# Altium PCB trigger_box_v1.PcbDoc
Units mil, origin at the board's own origin, x right, y up, seen from the top; angles counter-clockwise.
Board outline 2165.74 x 2165.73 mil, 2 copper layers (Top Layer, Bottom Layer); 62 components, 62 nets, 324 pads, 114 vias.
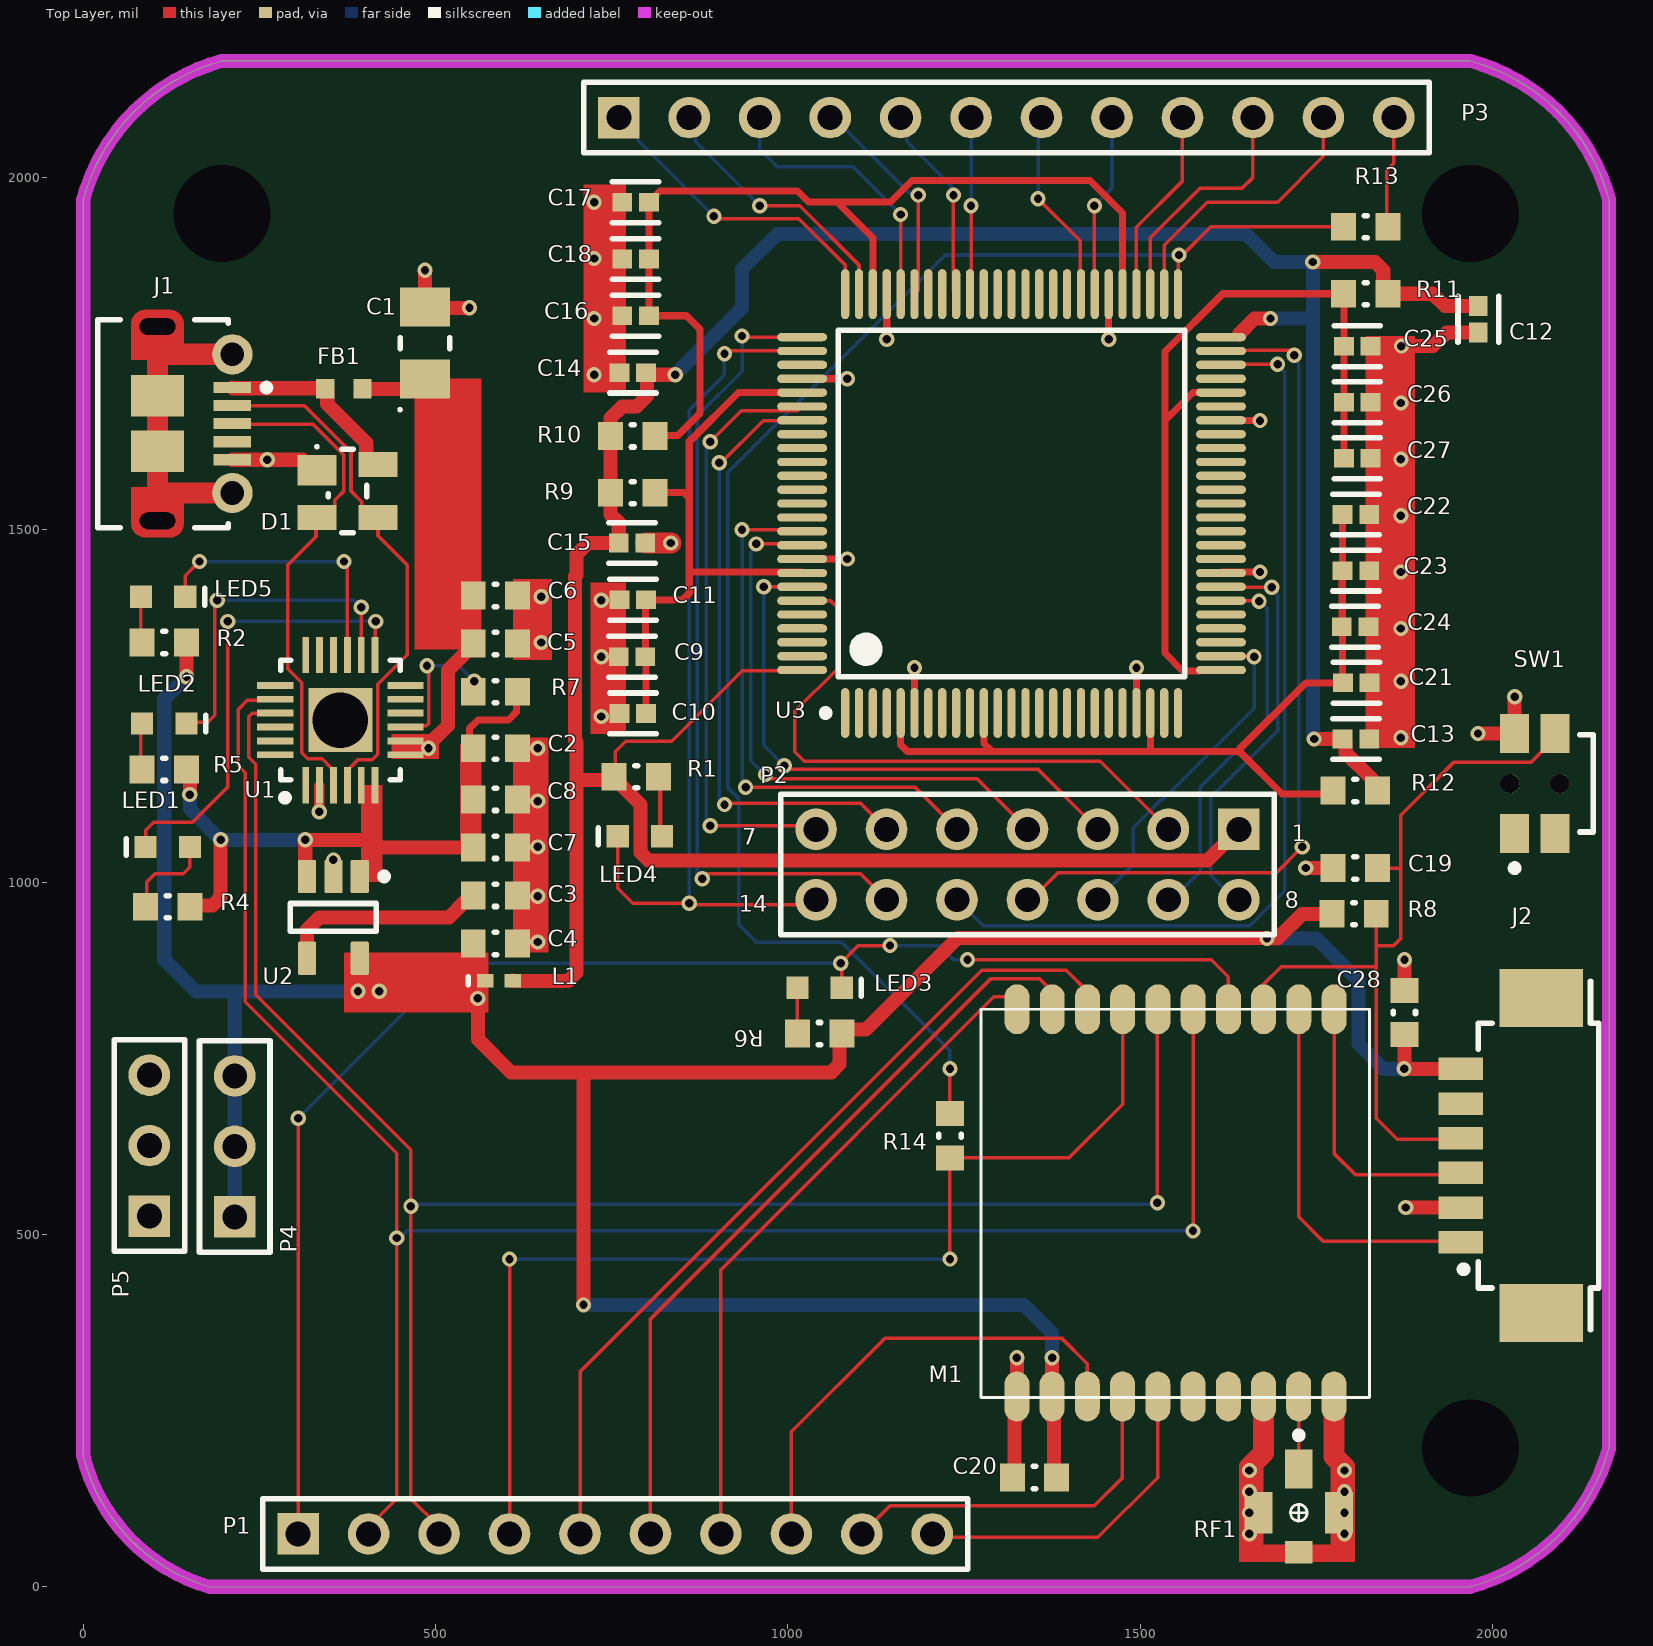
[diagram p0: Top Layer view]
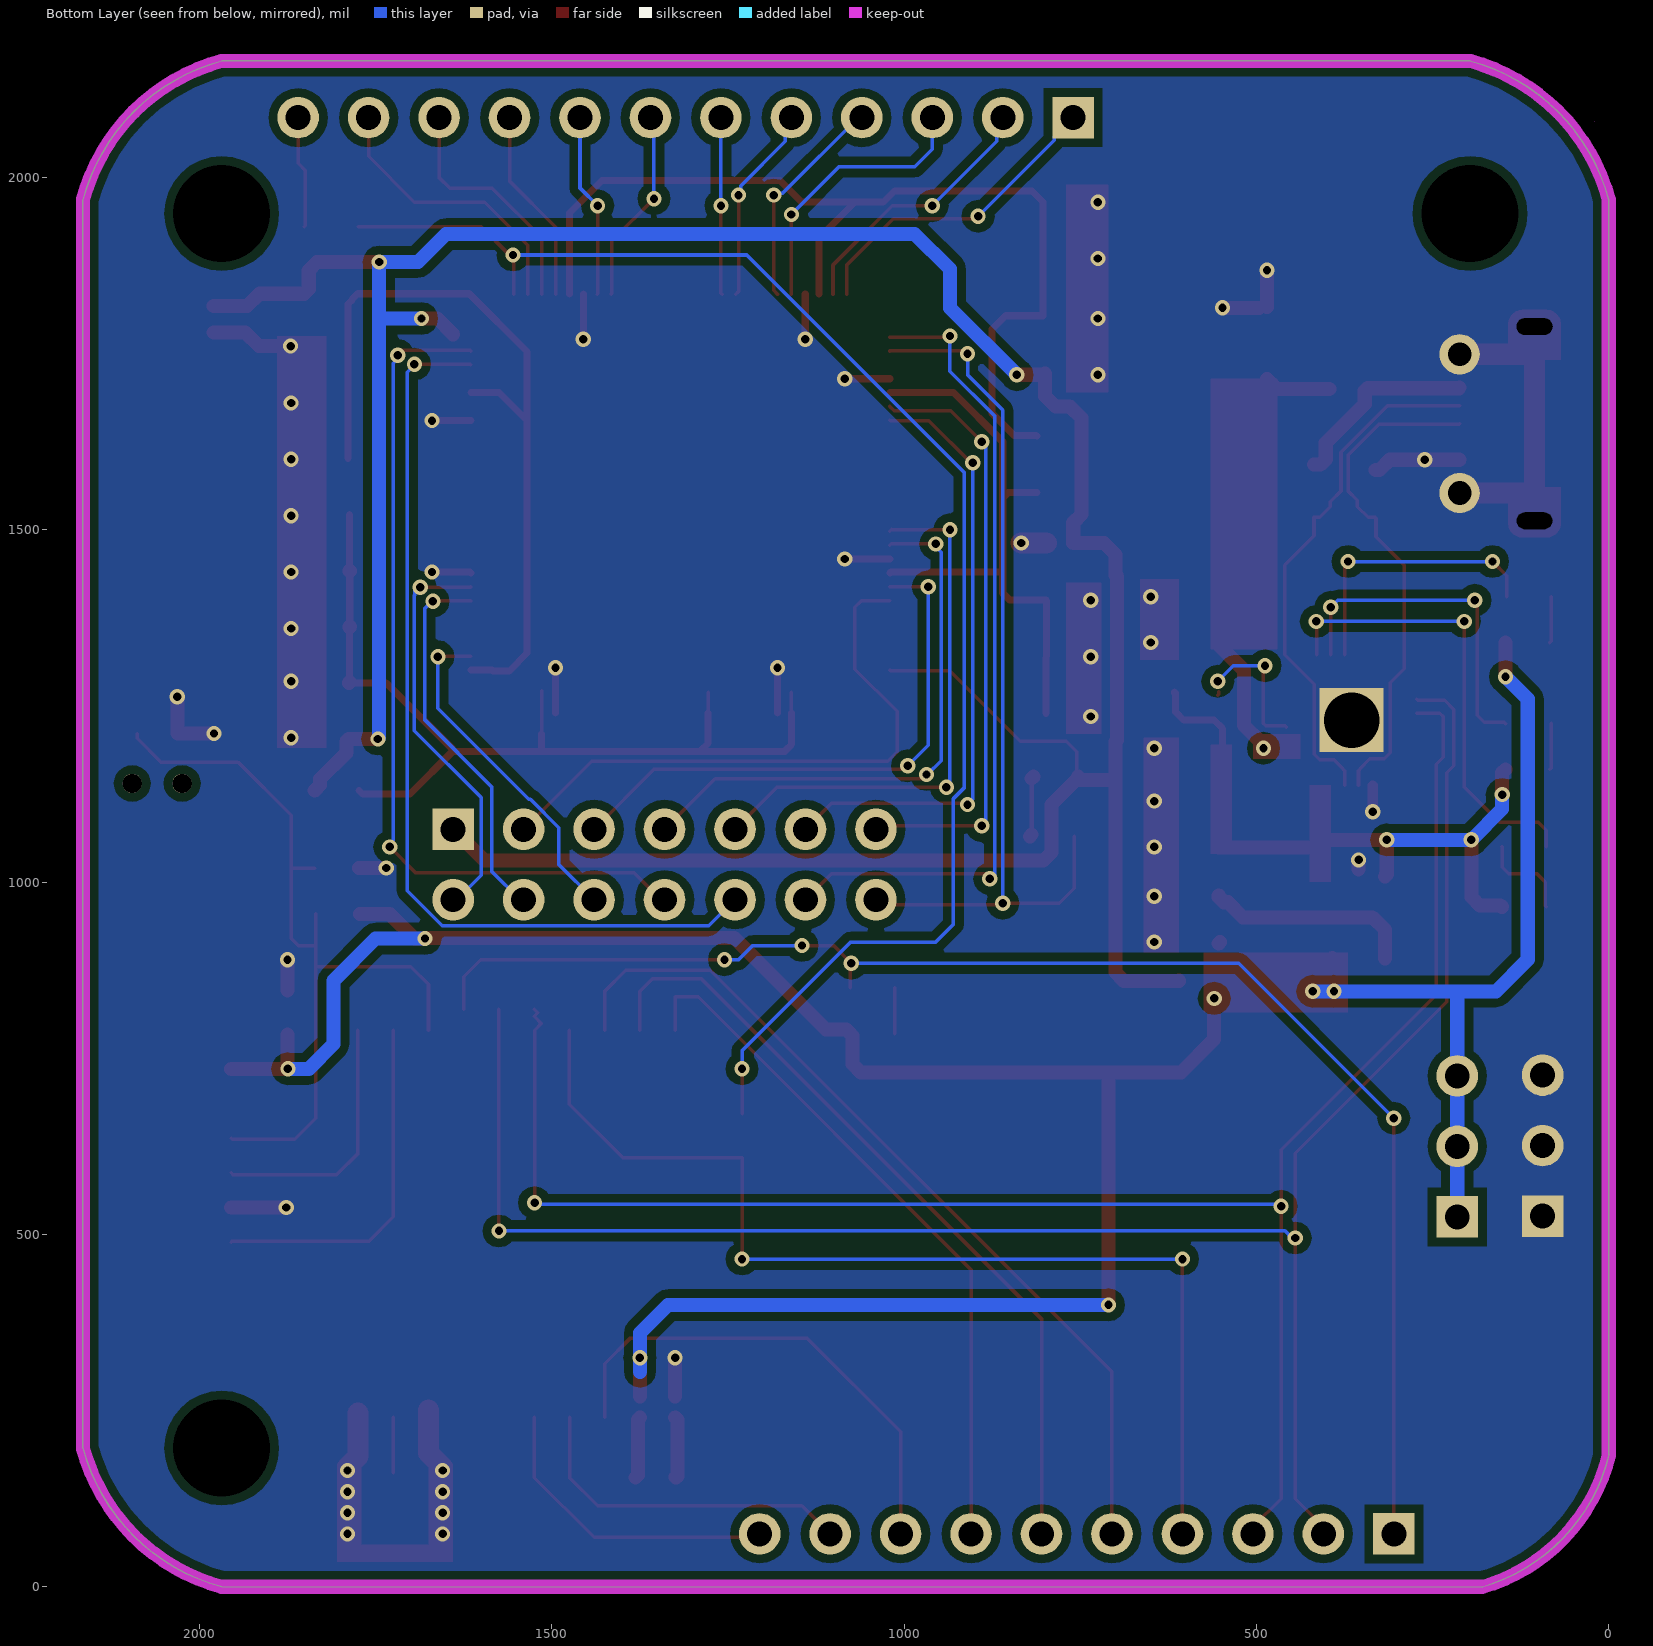
[diagram p1: Bottom Layer view, seen from below]

## Layer stack, top to bottom
Top Solder: solder mask 0.4, Solder Resist, Dk 3.5
Top Layer: signal copper 1.4
Dielectric 1: dielectric 12.6, FR-4, Dk 4.8
Bottom Layer: signal copper 1.4
Bottom Solder: solder mask 0.4, Solder Resist, Dk 3.5

## Board outline
179.49,-0.38 cw(c251.82,249.08) -0.38,186.99 0,187.08 0,1968.5 cw(c268.9,1896.45) 196.85,2165.35 1968.5,2165.35 cw(c1896.45,1896.45) 2165.35,1968.5 2165.35,196.85 cw(c1896.45,268.9) 1968.5,0

## Design rules (kind name [scope] priority, off if disabled: settings)
Clearance Clearance_POW [InPoly] p1: gap=12 ignorepadtopadclearanceinfootprint=FALSE
Clearance [InNetClass('All Nets')] p2: gap=5 ignorepadtopadclearanceinfootprint=FALSE
HoleSize [All] p1: absolutevalues=TRUE maxlimit=200 minlimit=1 maxpercent=80.000 minpercent=20.000
HoleToHoleClearance [All] p1: gap=0 allowstackedmicrovias=TRUE
MinimumSolderMaskSliver [All] p1: minsoldermaskwidth=0
PlaneConnect [All] p1: planeconnectstyle=Direct reliefexpansion=20 reliefentries=4 reliefconductorwidth=10 reliefairgap=10
PolygonConnect [All] p1: connectstyle=Direct reliefconductorwidth=10 reliefentries=4 polygonreliefangle="90 Angle" airgapwidth=10
RoutingVias [All] p1: holewidth=11.81 width=19.68 viastyle="Through Hole" minholewidth=11.81 minwidth=19.68 maxholewidth=200 maxwidth=200
SilkToSilkClearance [All] p1: silktosilkclearance=0
SilkToSolderMaskClearance [IsPad] p1: minsilkscreentomaskgap=0 clearancetoexposedcopper=TRUE
SolderMaskExpansion [All] p1: expansion=4 istentingtop=FALSE
Width [InNetClass('VCC')] p1: maxlimit=1000 minlimit=5 preferedwidth=5 minimp=50.000000 maximp=50.000000 favimp=50.000000
24 further rules are at their usual default settings.

## Classes and differential pairs
net class POW: 3.3V 3.3VD CP2102_3.3VDD VBUS VBUS_IN VCCIO0 VCCIO1 VCCIO2 VCCIO3

## Components (designator, comment, footprint, x,y, rotation, side; value= is the part's Value field where it differs from the comment)
C1 "TAJA106K016RNJ" CAPMP3217X18-T_V 485,1765 r90 top
C2 "1uF" CAPC0603(1608)55_N 585,1190 r180 top value=4.7uF
C3 "10nF" CAPC0603(1608)55_N 585,981.13 r180 top value=4.7uF
C4 "2.2uF" CAPC0603(1608)55_N 585,912.99 r180 top value=4.7uF
C5 "CAP 100nF 6.3V" CAPC0603(1608)100_N 585,1338.71 r180 top value=100nF
C6 "CAP 4.7uF 6.3V" CAPC0603(1608)100_N 585,1406.85 r180 top value=4.7uF
C7 "CAP 100nF 6.3V" CAPC0603(1608)100_N 585,1049.28 r180 top value=100nF
C8 "CAP 4.7uF 6.3V" CAPC0603(1608)100_N 585,1117.42 r180 top value=4.7uF
C9 "0.1uF" FP-GRM155-0_05-IPC_A 778.84,1320.04 r180 top
C10 "0.1uF" FP-GRM155-0_05-IPC_A 780,1239.42 r180 top
C11 "0.01uF" FP-GRM155-0_05-IPC_A 780,1400.66 r180 top
C12 "10uF" FP-GRM155-0_05-IPC_A 1980,1798.84 r270 top
C13 "1uF" FP-GRM155-0_05-IPC_A 1806.16,1203.18 r0 top
C14 "0.1uF" FP-GRM155-0_05-IPC_A 780,1723.14 r180 top
C15 "0.01uF" FP-GRM155-0_05-IPC_A 778.84,1481.28 r0 top
C16 "0.1uF" FP-GRM155-0_05-IPC_A 783.84,1803.76 r180 top
C17 "0.1uF" FP-GRM155-0_05-IPC_A 783.84,1965 r180 top
C18 "0.01uF" FP-GRM155-0_05-IPC_A 783.84,1884.38 r180 top
C19 "CAP 1uF 25V" CAPC0603(1608)100_N 1805,1020 r180 top value=1uF
C20 "CAP 100nF 6.3V" CAPC0603(1608)100_N 1350,155 r0 top value=100nF
C21 "0.1uF" FP-GRM155-0_05-IPC_A 1806.69,1282.82 r0 top
C22 "0.1uF" FP-GRM155-0_05-IPC_A 1806.16,1521.77 r0 top
C23 "0.1uF" FP-GRM155-0_05-IPC_A 1806.16,1442.12 r0 top
C24 "0.01uF" FP-GRM155-0_05-IPC_A 1805,1362.47 r0 top
C25 "0.1uF" FP-GRM155-0_05-IPC_A 1808.01,1760.71 r0 top
C26 "0.1uF" FP-GRM155-0_05-IPC_A 1808.01,1681.06 r0 top
C27 "0.01uF" FP-GRM155-0_05-IPC_A 1808.01,1601.41 r0 top
C28 "CAP 100nF 6.3V" CAPC0603(1608)100_N 1875,815 r270 top value=100nF
D1 "SP0503BAHTG" LFUS-SOT143-4_V 375,1555 r0 top
FB1 "BLM18PG600SN1J" MURA-BLM18PG_KG-CHIP-2_V2 370,1700 r180 top
J1 "105017-0001" USB-MICRO-B_V 158.46,1650.63 r270 top
J2 "Header 6" GH-1.25-WS-6P 2065.24,611.97 r90 top
L1 "500mA" 0402-A 590,860 r0 top value=600ohm
LED1 "150060BS75000" 0603_A 120,1050 r0 top
LED2 "150060BS75000" 0603_A 115,1225 r180 top
LED3 "150060BS75000" 0603_A 1045,850 r180 top
LED4 "150060BS75000" 0603_A 790,1065 r0 top
LED5 "150060BS75000" 0603_A 113.25,1405 r180 top
M1 "CC1310-Module (Silicontrac)" CC1310ZTR4-GC 1825.32,270.61 r180 top
P1 "Header 10" HDR1X10 305,75 r0 top
P2 "Header 7X2A" HDR2X7_CEN 1640,1075 r180 top
P3 "Header 12" HDR1X12 760,2085 r0 top
P4 "Header 3" HDR1X3 215,525 r90 top
P5 "Header 3" HDR1X3 93.79,526.06 r90 top
R1 "1K 1%" RESC0603(1608)_N 785,1149.56 r180 top value="1000.00 Ohm"
R2 "1K 1%" RESC0603(1608)_N 115,1340 r0 top value="1000.00 Ohm"
R4 "1K 1%" RESC0603(1608)_N 120,965 r0 top value="1000.00 Ohm"
R5 "1K 1%" RESC0603(1608)_N 115,1160 r0 top value="1000.00 Ohm"
R6 "1K 1%" RESC0603(1608)_N 1045,785 r0 top value="1000.00 Ohm"
R7 "1K 1%" RESC0603(1608)_N 585,1270 r180 top value="1000.00 Ohm"
R8 "10K 1% 0603(1608)" RESC0603(1608)_N 1803.5,955 r0 top value="10000.00 Ohm"
R9 "1" RESC0603(1608)_N 780,1552.66 r180 top value="1000.00 Ohm"
R10 "1" RESC0603(1608)_N 780,1633.28 r180 top value="1000.00 Ohm"
R11 "1" RESC0603(1608)_N 1820,1835 r0 top value="1000.00 Ohm"
R12 "1" RESC0603(1608)_N 1805,1130 r0 top value="1000.00 Ohm"
R13 "0" RESC0603(1608)_N 1820,1930 r0 top value="10000.00 Ohm"
R14 "1K 5%" RESC0603(1608)_N 1230,640 r270 top value="10000.00 Ohm"
RF1 "RECE-20369-001E-01" IPEX_MHF_I 1725,105 r180 top
SW1 "EVQ-P7D01K" FP-EVQ-P7D01K-MFG 2060,1140 r90 top
U1 "CP2102N-A01-GQFN24" SLAB-QFN-24-2550x2550TP_A_V 365,1230 r90 top
U2 "LP2985-33DBVR" DBV0005A_M 355,950 r270 top
U3 "LCMXO2-256HC-4TG100I" TQFP100_N 1317.48,1537.24 r90 top

## Footprints (in the part's own frame and the unit in brackets; to place one, negate y for a bottom-side part, rotate by r counter-clockwise, add the part's x,y. Pads: shape width x height; smd on the part's side, far side on the other; paste and mask are expansions set on the pad)
0402-A [mm] "Chip Inductor, Body 1.0x0.5mm, IPC High Density"
  rect 0.6x0.5 smd: 1(-0.5,0) 2(0.5,0)
  silkscreen extent -1.1,-0.15 -1.1,0.15, body extent -0.55,-0.3 0.55,0.3, height 0.55
0603_A [mm] "Chip LED, 2-Leads, Body 1.6x0.8mm, IPC Medium Density"
  rect 0.8x0.8 smd: 1(-0.8,0) 2(0.8,0)
  silkscreen extent -1.5,-0.3 -1.5,0.3, body extent -0.8,-0.4 0.8,0.4, height 0.7
CAPC0603(1608)55_N [mm] "Chip Capacitor, Body 1.6x0.8mm, Height 0.55mm, IPC Medium Density"
  rect 0.9x1 smd: 1(-0.8,0) 2(0.8,0)
  silkscreen extent -0.05,-0.4 0.05,0.4, body extent -0.87,-0.48 0.88,0.47, height 0.55
CAPC0603(1608)100_N [mm] "Chip Capacitor, Body 1.6x0.8mm, Height 1.0mm, IPC Medium Density"
  rect 0.9x1 smd: 1(-0.8,0) 2(0.8,0)
  silkscreen extent -0.05,-0.4 0.05,0.4, body extent -0.87,-0.48 0.88,0.47, height 1
CAPMP3217X18-T_V [mm] "Molded Capacitor, 2-Leads, Body 3.40x1.8mm"
  rect 1.4x1.8 smd: 1(-1.3,0) 2(1.3,0)
  silkscreen extent -2.45,-0.9 0.2,0.95, body extent -1.92,-0.9 1.92,0.9, height 1.8
CC1310ZTR4-GC [mm]
  oval 0.9x1.8 smd: 1(1.27,-13.945) 2(2.544,-13.945) 3(3.814,-13.945) 4(5.084,-13.945) 5(6.354,-13.945) 6(7.624,-13.945) 7(8.894,-13.945) 8(10.164,-13.945) 9(11.434,-13.945) 10(12.704,-13.945) 11(12.708,0.015) 12(11.438,0.015) 13(10.168,0.015) 14(8.898,0.015) 15(7.628,0.015) 16(6.358,0.015) 17(5.088,0.015) 18(3.818,0.015) 19(2.548,0.015) 20(1.28,0.015)
  silkscreen extent 0,-13.94 14,0.06
DBV0005A_M [mm] "SOT23, 5-Leads, Body 3.05x1.75mm, Pitch 0.95mm, IPC Low Density"
  rrect15% 1.2x0.65 smd: 1(-1.475,0.95) 2(-1.475,0) 3(-1.475,-0.95) 4(1.475,-0.95) 5(1.475,0.95)
  silkscreen extent -1.6,-1.55 0.5,1.95, body extent -1.42,-1.46 1.42,1.46, height 1.08
FP-EVQ-P7D01K-MFG [mm]
  rect 1.4x1.05 smd paste+0 mask+0: 1(-1.8,0.725) 1'(1.8,0.725) 2(-1.8,-0.725) 2'(1.8,-0.725)
  round 0.7 hole 0.7 unplated paste-1000 mask+0: ""(0,0.9) ""(0,-0.9)
  silkscreen extent -3.17,-2.1 1.75,0.85, body extent -2.6,-2.2 2.6,1.55, height 0.25
FP-GRM155-0_05-IPC_A [mil]
  rect 28.16x26.48 smd paste+0 mask+0: 1(-18.84,0) 2(18.84,0)
  silkscreen extent -33,-29 33,29, body extent -41,-21 41,21, height 10
GH-1.25-WS-6P [mm]
  rect 0.81x1.6 smd: 1(-3.125,2.8) 2(-1.875,2.8) 3(-0.625,2.8) 4(0.625,2.8) 5(1.875,2.8) 6(3.125,2.8)
  rect 2.1x3 smd: MP1(-5.675,-0.1) MP2(5.675,-0.1)
  silkscreen extent -6.27,-2.17 6.27,2.82, body extent -6.13,-2.1 6.13,3.3, height 3.4
HDR1X3 [mm] "Connector; Header; 3 Position"
  rect 1.5x1.5 hole 0.9: 1(0,0)
  round 1.5 hole 0.9: 2(2.54,0) 3(5.08,0)
  silkscreen extent -1.27,-1.27 6.35,1.27
HDR1X10 [mm] "Connector; Header; 10 Position"
  rect 1.5x1.5 hole 0.9: 1(0,0)
  round 1.5 hole 0.9: 2(2.54,0) 3(5.08,0) 4(7.62,0) 5(10.16,0) 6(12.7,0) 7(15.24,0) 8(17.78,0) 9(20.32,0) 10(22.86,0)
  silkscreen extent -1.27,-1.27 24.13,1.27
HDR1X12 [mm] "Connector; Header; 12 Position"
  rect 1.5x1.5 hole 0.9: 1(0,0)
  round 1.5 hole 0.9: 2(2.54,0) 3(5.08,0) 4(7.62,0) 5(10.16,0) 6(12.7,0) 7(15.24,0) 8(17.78,0) 9(20.32,0) 10(22.86,0) 11(25.4,0) 12(27.94,0)
  silkscreen extent -1.27,-1.27 29.21,1.27
HDR2X7_CEN [mm] "Connector; Header; 7x2 Position"
  rect 1.5x1.5 hole 0.9: 1(0,0)
  round 1.5 hole 0.9: 2(2.54,0) 3(5.08,0) 4(7.62,0) 5(10.16,0) 6(12.7,0) 7(15.24,0) 8(0,2.54) 9(2.54,2.54) 10(5.08,2.54) 11(7.62,2.54) 12(10.16,2.54) 13(12.7,2.54) 14(15.24,2.54)
  silkscreen extent -1.27,-1.27 16.51,3.81
IPEX_MHF_I [mm]
  rect 1x1.4 smd: 1(0,-1.575)
  rect 1x1.5 smd: 2(1.448,0) 3(-1.448,0)
  rect 1x0.8 smd: 4(0,1.422)
  silkscreen extent -0.3,-2.92 0.3,0.3, body extent -0.85,-0.85 0.85,0.85, height 0.85
LFUS-SOT143-4_V [mm] "SOT143, 4-Leads, Body 3.04x1.4mm, Pitch 1.90mm"
  rect 1.4x1.1 smd: 1(-1.1,0.75)
  rect 1.4x0.9 smd: 2(-1.1,-0.95) 3(1.1,-0.95) 4(1.1,0.95)
  silkscreen extent -1.15,-1.5 0.7,1.65, body extent -0.7,-1.52 0.7,1.52, height 1.22
MURA-BLM18PG_KG-CHIP-2_V2 [mm] "Chip Ferrite Bead, 2-Leads, Body 1.6x0.8mm, Height 0.95mm, Reflow, 0.5 to 1.5A Rated Current"
  rect 0.65x0.7 smd: 1(-0.675,0) 2(0.675,0)
  body extent -0.8,-0.4 0.8,0.4, height 0.95
RESC0603(1608)_N [mm] "Chip Resistor, Body 1.6x0.8mm, IPC Medium Density"
  rect 0.9x1 smd: 1(-0.8,0) 2(0.8,0)
  silkscreen extent -0.05,-0.4 0.05,0.4, body extent -0.85,-0.47 0.85,0.47, height 0.6
SLAB-QFN-24-2550x2550TP_A_V [mm]
  rect 1.3x0.25 smd: 1(-2.35,1.25) 2(-2.35,0.75) 3(-2.35,0.25) 4(-2.35,-0.25) 5(-2.35,-0.75) 6(-2.35,-1.25) 13(2.35,-1.25) 14(2.35,-0.75) 15(2.35,-0.25) 16(2.35,0.25) 17(2.35,0.75) 18(2.35,1.25)
  rect 0.25x1.3 smd: 7(-1.25,-2.35) 8(-0.75,-2.35) 9(-0.25,-2.35) 10(0.25,-2.35) 11(0.75,-2.35) 12(1.25,-2.35) 19(1.25,2.35) 20(0.75,2.35) 21(0.25,2.35) 22(-0.25,2.35) 23(-0.75,2.35) 24(-1.25,2.35)
  rect 2.3x2.3 hole 2: 25(0,0)
  silkscreen extent -2.92,-2.15 2.15,2.15, body extent -2,-2 2,2, height 0.8
TQFP100_N [mm] "Thin QFP, 100-Leads, Body 14x14mm, Pitch 0.5mm, IPC Medium Density"
  oval 1.8x0.3 smd: 1(-7.55,6) 2(-7.55,5.5) 3(-7.55,5) 4(-7.55,4.5) 5(-7.55,4) 6(-7.55,3.5) 7(-7.55,3) 8(-7.55,2.5) 9(-7.55,2) 10(-7.55,1.5) 11(-7.55,1) 12(-7.55,0.5) 13(-7.55,0) 14(-7.55,-0.5) 15(-7.55,-1) 16(-7.55,-1.5) 17(-7.55,-2) 18(-7.55,-2.5) 19(-7.55,-3) 20(-7.55,-3.5) 21(-7.55,-4) 22(-7.55,-4.5) 23(-7.55,-5) 24(-7.55,-5.5) 25(-7.55,-6) 51(7.55,-6) 52(7.55,-5.5) 53(7.55,-5) 54(7.55,-4.5) 55(7.55,-4) 56(7.55,-3.5) 57(7.55,-3) 58(7.55,-2.5) 59(7.55,-2) 60(7.55,-1.5) 61(7.55,-1) 62(7.55,-0.5) 63(7.55,0) 64(7.55,0.5) 65(7.55,1) 66(7.55,1.5) 67(7.55,2) 68(7.55,2.5) 69(7.55,3) 70(7.55,3.5) 71(7.55,4) 72(7.55,4.5) 73(7.55,5) 74(7.55,5.5) 75(7.55,6)
  oval 0.3x1.8 smd: 26(-6,-7.55) 27(-5.5,-7.55) 28(-5,-7.55) 29(-4.5,-7.55) 30(-4,-7.55) 31(-3.5,-7.55) 32(-3,-7.55) 33(-2.5,-7.55) 34(-2,-7.55) 35(-1.5,-7.55) 36(-1,-7.55) 37(-0.5,-7.55) 38(0,-7.55) 39(0.5,-7.55) 40(1,-7.55) 41(1.5,-7.55) 42(2,-7.55) 43(2.5,-7.55) 44(3,-7.55) 45(3.5,-7.55) 46(4,-7.55) 47(4.5,-7.55) 48(5,-7.55) 49(5.5,-7.55) 50(6,-7.55) 76(6,7.55) 77(5.5,7.55) 78(5,7.55) 79(4.5,7.55) 80(4,7.55) 81(3.5,7.55) 82(3,7.55) 83(2.5,7.55) 84(2,7.55) 85(1.5,7.55) 86(1,7.55) 87(0.5,7.55) 88(0,7.55) 89(-0.5,7.55) 90(-1,7.55) 91(-1.5,7.55) 92(-2,7.55) 93(-2.5,7.55) 94(-3,7.55) 95(-3.5,7.55) 96(-4,7.55) 97(-4.5,7.55) 98(-5,7.55) 99(-5.5,7.55) 100(-6,7.55)
  silkscreen extent -7.67,-6.25 6.25,6.82, body extent -7,-7 7,7, height 1.6
USB-MICRO-B_V [mm] "USB, MICRO B, Body 7.491x4.695 mm, Pitch 0.65 mm"
  rect 0.4x1.35 smd: 1(-1.3,1.35) 2(-0.65,1.35) 3(0,1.35) 4(0.65,1.35) 5(1.3,1.35)
  round 1.45 hole 0.85: 6(-2.5,1.35) 7(2.5,1.35)
  rrect50% 0x0 hole 0.6 slot 1.3 at 90 deg: 8(-3.5,-1.35) 11(3.5,-1.35)
  rect 1.5x1.9 smd: 9(-1,-1.35) 10(1,-1.35)
  Top Layer circle w0.5: c-3.6,-1.8 r0.25
  Top Layer circle w0.5: c-3.6,-0.9 r0.25
  Top Layer circle w0.5: c3.6,-1.8 r0.25
  Top Layer circle w0.5: c3.6,-0.9 r0.25
  Top Layer region: -3.6,-1.8 -3.6,-0.9 -4.1,-0.9 -4.1,-1.8
  Top Layer region: 3.6,-0.9 3.6,-1.8 4.1,-1.8 4.1,-0.9
  Top Layer region: 2.3,-0.4 2.3,-2.3 3.6,-2.3 3.6,-0.4
  Top Layer region: -2.3,-2.3 -2.3,-0.4 -3.6,-0.4 -3.6,-2.3
  silkscreen extent -3.75,-3.5 3.75,2.7, body extent -4.1,-3.9 4.1,1.5, height 2.67

## Part data
C1: library part CMP-1661-00004-1, "Standard Tantalum, 10 uF, +/- 10%, 16 V, -55 to 125 degC, 2-Pin SMD (1206), RoHS, Tape and Reel", Case\Package=SOT-26, Frequency="300 MHz", Max Operating Temperature="150 degC", Max Power Dissipation="300 mW", Min Operating Temperature="-55 degC", Package Quantity=3000, ComponentLink1Description="Manufacturer URL", ComponentLink1URL=http://www.avx.com/, ComponentLink2Description=Datasheet, ComponentLink2URL=http://datasheets.avx.com/TAJ.pdf, ComponentLink3Description="Package Specification", ComponentLink3URL=http://www.avx.com/download/software/literature/AVX-Footprint-Library.pdf, DatasheetVersion=Feb-16, Elements=2, Height="1.3 mm", hFE Min=60, Length="3.1 mm", Mount="Surface Mount", PackageDescription="2-Pin Surface Mount Device, Body 3.2 x 1.65 mm", PackageReference=CAPMP3217X18-T, Packaging="Tape and Reel", Pins=6, Radiation Hardening=No, REACH SVHC="No SVHC", RoHSCompliant=true, Vce Max="500 mV", Width="1.7 mm"
C2 C3 C4: library part CMP-1035-02786-1, "CAP 4.7uF 10V ±20% 0603 (1608 Metric) Thickness 0.55mm SMD", Case-EIA=0603, Case-Metric=1608, Rated Voltage="10 V", Tolerance=Â±20%, Max Thickness="0.55 mm", Technology=SMT
C5 C7: library part CMP-1035-02575-1, "CAP 100nF 6.3V ±5% 0603 (1608 Metric) Thickness 1mm SMD", Case-EIA=0603, Case-Metric=1608, Rated Voltage="6.3 V", Tolerance=Â±5%, Max Thickness="1 mm", Technology=SMT
C6 C8: library part CMP-1035-02782-1, "CAP 4.7uF 6.3V ±20% 0603 (1608 Metric) Thickness 1mm SMD", Case-EIA=0603, Case-Metric=1608, Rated Voltage="6.3 V", Tolerance=Â±20%, Max Thickness="1 mm", Technology=SMT
C9 C10 C12 C13 C14 C15 C16 C17 C21 C22 C23 C25 C26: library part CMP-2008-04561-5, "CAP CER 0.1UF 10V X5R 0402", Capacitance=220nF, Case Code (Imperial)=0402, Case Code (Metric)=1005, Dielectric=X5R, Dielectric Material=Ceramic, Insulation Resistance=10GR, Max Operating Temperature=85°C, Min Operating Temperature=-55°C, Package Quantity=1, Tolerance=10%, Voltage=10V, Case/Package=0402, Depth=0.5mm, Height=0.5mm, Lead Free="Lead Free", Length=1mm, Material=Ceramic, Mount="Surface Mount", Number of Pins=2, Packaging="Tape and Reel", Radiation Hardening=No, REACH SVHC="No SVHC", RoHS Compliant=Yes, Series=GRM, Termination=SMD/SMT, Thickness=0.022inch, Voltage Rating=10V, Voltage Rating (DC)=10V, Width=0.5mm
C11 C18 C24 C27: library part CMP-2008-04561-5, "CAP CER 0.01UF 10V X5R 0402", Capacitance=220nF, Case Code (Imperial)=0402, Case Code (Metric)=1005, Dielectric=X5R, Dielectric Material=Ceramic, Insulation Resistance=10GR, Max Operating Temperature=85°C, Min Operating Temperature=-55°C, Package Quantity=1, Tolerance=10%, Voltage=10V, Case/Package=0402, Depth=0.5mm, Height=0.5mm, Lead Free="Lead Free", Length=1mm, Material=Ceramic, Mount="Surface Mount", Number of Pins=2, Packaging="Tape and Reel", Radiation Hardening=No, REACH SVHC="No SVHC", RoHS Compliant=Yes, Series=GRM, Termination=SMD/SMT, Thickness=0.022inch, Voltage Rating=10V, Voltage Rating (DC)=10V, Width=0.5mm
C19: library part CMP-1035-02741-1, "CAP 1uF 25V ±20% 0603 (1608 Metric) Thickness 1mm SMD", Case-EIA=0603, Case-Metric=1608, Rated Voltage="25 V", Tolerance=Â±20%, Max Thickness="1 mm", Technology=SMT
C20 C28: library part CMP-1035-02576-1, "CAP 100nF 6.3V ±10% 0603 (1608 Metric) Thickness 1mm SMD", Case-EIA=0603, Case-Metric=1608, Rated Voltage="6.3 V", Tolerance=Â±10%, Max Thickness="1 mm", Technology=SMT
D1: library part CMP-2000-05191-1, "TVS Diode Array, 30 pF, 30 KV, -40 to 85 degC, 4-Pin SOT143, RoHS, Tape and Reel", Capacitance Value=30pF, Clamping Voltage=8V, Leakage Current=0.1uA, Manufacturer=Littelfuse, Operating Temp Range=-40Cto85C, Operating Temperature Classification=Industrial, Operating Temperature Max Deg. C=85C, Operating Temperature Min Deg. C=-40C, Package / Case=SOT-143, Reverse Stand-off Voltage=5.5(Min)V, Working Voltage=5.5V, Working Voltage (Max)=5.5V(Min), Clamping Voltage (Max)=8V, Configuration=Triple, Datasheet URL=https://datasheet.ciiva.com/15143/getdatasheetpartid-116020-15143550.pdf, Datasheet Version=Dec-13, Direction Type=Uni-Directional, Leakage Current (Max)=0.1uA, Manufacturer URL=http://www.littelfuse.com/, Mounting=SurfaceMount, Mounting Style=SurfaceMount, Number of Elements=3, Package Type=SOT-143, Packaging=TapeandReel, Pin Count=3+Tab, Polarity=Uni-Directional, Product Depth (mm)=1.4mm, Product Height (mm)=1.05mm, Product Length (mm)=3.04mm, Rad Hardened=No, Suppressor Type=TVS
FB1: library part CMP-0686-00574-2, "Chip Ferrite Bead for Power Lines, 60 Ohm, 500 mA, -55 to 125 degC, 1.6 x 0.8 x 0.95 mm SMD, Tape and Reel", DC Resistance="0.10 Ohm Max.", Manufacturer=Murata, Operating Temperature Range="-55 to 125 degC", Rated Current="500 mA", ComponentLink1Description="Manufacturer URL", ComponentLink1URL=http://www.murata.com/, ComponentLink2Description=Datasheet, ComponentLink2URL=http://www.murata.com/products/catalog/pdf/c31e.pdf, ComponentLink3Description="Package Specification", ComponentLink3URL=http://www.murata.com/products/catalog/pdf/c31e.pdf, DatasheetVersion=08/2013, Impedance (at 100 MHz)="60 Ohm Typ.", Mounting Technology="Surface Mount", PackageDescription="2-Pin Chip, Body 1.6 x 0.8 mm", PackageReference=BLM18_H950-2, Packing="Tape and Reel", PartNumber=BLM18PG600SN1J
J1: library part CMP-2000-05827-1, "Micro-USB B Receptacle, Right Angle, Bottom Mount, Surface Mount, with Solder Tabs, -30 to 85 degC, 5-Pin USB, RoHS, Tape and Reel", Manufacturer=Molex, Package Description="5-Leads USB, Micro B, Body 7.5 x 5 mm, Pitch 0.65 mm", Package Reference=MICRO-B, Package Version="Rev. F, 12/2012", Standard Package=1, Voltage - Max=30V, 3D Model=105017-0001.stp, Catalog Drawings=1050170001, Category=Connectors,Interconnects, Circuits=5, Connector Type=USB-microB, Datasheet URL=http://www.molex.com/elqNow/elqRedir.htm?ref=http://www.molex.com/webdocs/datasheets/pdf/en-us/1050170001_IO_CONNECTORS.pdf, Datasheet Version=03/2016, Family=USB,DVI,HDMIConnectors, Featured Product=Micro-USBConnectorsUSBConnectors, Features=Shielded,SolderRetention, Gender=Receptacle, Ingress Protection=-, Manufacturer URL=http://www.molex.com/, Mating Products=WM17145-ND-CABLEMICROUSBBTOSTDA1.0MWM17147-ND-CABLEMICROUSBBTOSTDA2.0MWM17146-ND-CABLEMICROUSBBTOSTDA1.5M, Mounting Technology=SurfaceMount, Mounting Type=BoardCutout,SurfaceMount,RightAngle, Number Of Contacts=5, Online Catalog=Molex-MicroUSB, Other Names=WM1399DKR, Package URL=http://www.molex.com/pdm_docs/sd/1050170001_sd.pdf, Packaging=Digi-Reel®, PCN Assembly/Origin=ResinSupplier21/Oct/2015, RoHS Information=1050170001CertofCompliance, Series=-, Specifications=-
J2: "Header, 6-Pin", LatestRevisionDate=17-Jul-2002, LatestRevisionNote="Re-released for DXP Platform.", Publisher="Altium Limited"
L1: library part Inductor, "Inductor", Code_IEC=1005, Code_JEITA=0402, LatestRevisionDate=29-May-2009, LatestRevisionNote="IPC-7351 Footprint Added.", PackageDescription="Chip Inductor", PackageReference=0402-A, Published=8-Jun-2000, Publisher="Altium Limited"
LED1 LED2 LED3 LED4 LED5: library part CMP-1426-00003-1, "SMD mono-color Chip LED, WL-SMCW, Blue", Color=Blue, Manufacturer="Wuerth Elektronik", ComponentLink1Description="Manufacturer URL", ComponentLink1URL=http://www.we-online.com, ComponentLink2Description=Datasheet, ComponentLink2URL=http://katalog.we-online.com/led/datasheet/150060BS75000.pdf, PackageReference=0603_A, PartNumber=150060BS75000
M1: library part CC1310-MOD
P1: "Header, 10-Pin", LatestRevisionDate=17-Jul-2002, LatestRevisionNote="Re-released for DXP Platform.", Publisher="Altium Limited"
P2: "Header, 7-Pin, Dual row", LatestRevisionDate=17-Jul-2002, LatestRevisionNote="Re-released for DXP Platform.", Publisher="Altium Limited"
P3: "Header, 12-Pin", LatestRevisionDate=17-Jul-2002, LatestRevisionNote="Re-released for DXP Platform.", Publisher="Altium Limited"
P4 P5: "Header, 3-Pin", LatestRevisionDate=17-Jul-2002, LatestRevisionNote="Re-released for DXP Platform.", Publisher="Altium Limited"
R1 R2 R4 R5 R6 R9 R10 R11 R12: library part CMP-1012-00510-1, "1K 0.1W 1% 0603 (1608 Metric)  SMD", Case-EIA=0603, Case-Metric=1608, Power="0.1 W", Tolerance="1 %", Technology=SMT
R7: library part CMP-1012-00510-1, "1K 0.1W 1% 0603 (1608 Metric)  SMD", Case-EIA=0603, Case-Metric=1608, Manufacturer="Vishay Dale", Manufacturer Part Number=CRCW06031K00FKEB, Power="0.1 W", Tolerance="1 %", Technology=SMT
R8 R13 R14: library part CMP-1012-00623-1, "10K 0.1W 1% 0603 (1608 Metric)  SMD", Case-EIA=0603, Case-Metric=1608, Power="0.1 W", Tolerance="1 %", Technology=SMT
RF1: library part TG-RECE-20369-001E-01-4, "RF Connector, Onboard Receptacle, IPEX MHFIII", Housing Color=Gold, Manufacturer=Taoglas, ComponentLink1Description="Manufacturer URL", ComponentLink1URL=http://www.taoglas.com/, ComponentLink2Description=Datasheet, ComponentLink2URL=http://www.taoglas.com/images/product_images/original_images/RECE.20369.001E.01.pdf, ComponentLink3Description="Package Specification", ComponentLink3URL=http://www.taoglas.com/images/product_images/original_images/RECE.20369.001E.01.pdf, DatasheetVersion="Rev. C", Mounting Technology="Surface Mount", PackageDescription="4-Pin, Hand Drawn, Body 1.7x1.7mm", PackageReference=RECE-20369-001E-01-4, PackageVersion="Rev. C", Packing="Tape and Reel", PartNumber=RECE-20369-001E-01
SW1: library part CMP-05618-000102-1, "SWITCH TACTILE SPST-NO 0.05A 12V", Actuator Color=Black, Contact Current Rating=50mA, Contact Resistance=500mR, Max Operating Temperature=70°C, Max Voltage Rating (DC)=12V, Min Operating Temperature=-20°C, Operating Force=2.2N, Package Quantity=1, Actuator Length=0.65mm, Current Rating=50mA, Depth=3.55mm, Electrical Life=100000Cycles, Illumination Type=Non-Illuminated, Lead Free="Lead Free", Length=4.3mm, Max Current Rating=50mA, Mechanical Life=100000Cycles, Mount="Surface Mount", Orientation="Right Angle", Packaging="Tape and Reel", Radiation Hardening=No, REACH SVHC="No SVHC", Series=EVQP7, Size=2.9mm, Switch Function=Off-Mom, Switch Travel=0.2mm, Termination=J-Bend, Throw Configuration=SPST, Voltage Rating (DC)=12V
U1: library part SLAB-CP2102N-QFN-24, "USBXpress(TM) Family, 4 GPIOs, 2.2 to 3.6 V, -40 to 85 degC, 24-Pin QFN, RoHS", Case\/Package=QFN, Manufacturer="Silicon Labs", Max Operating Temperature=85degC, Max Supply Voltage=3.6V, Min Operating Temperature=-40degC, Min Supply Voltage=3V, Package Description="24-Pin Quad Flat No-lead Package, Body 4 x 4 mm, Pitch 0.5 mm", Package Reference=QFN-24-2550x2550TP_A, Datasheet URL=http://www.silabs.com/documents/public/data-sheets/cp2102n-datasheet.pdf, Datasheet Version="Rev. 1.1, 08/2016", Manufacturer URL=http://www.silabs.com/, Mounting Technology=SurfaceMount, Number of Pins=24, REACH SVHC=Unknown, RoHSCompliant=False
U2: library part CMP-0758-00080-2, "Single Output Low Noise LDO, 150 mA, Fixed 3.3 V Output, 1.5% Tolerance, 2.2 to 16 V Input, Low IQ, 5-Pin SOT-23 (DBV), -40 to 125 degC, Green (RoHS & no Sb/Br), Tape and Reel", Manufacturer="Texas Instruments", Operating Temperature Range (degC)="-40 to 125", Accuracy (%)=1.5, ComponentLink1Description="Manufacturer URL", ComponentLink1URL=http://www.ti.com/, ComponentLink2Description=Datasheet, ComponentLink2URL=http://www.ti.com/lit/ds/symlink/lp2985-50.pdf, ComponentLink3Description="Package Specification", ComponentLink3URL=http://www.ti.com/litv/pdf/mpds018j, DatasheetVersion=SLVS522N, Fixed Output Options (V)=3.3, Iout (Max) (A)=0.15, Iq (Typ) (mA)=0.85, Mounting Technology="Surface Mount", Output Options="Fixed Output", PackageDescription="5-Pin Plastic Small Outline, Body 2.9 x 1.6 mm, Pitch 0.95 mm", PackageReference=DBV0005A, PackageVersion=4073253-4/L, Packing="Tape and Reel", PartNumber=LP2985-33DBVR, RoHS=TRUE, Vdo (Typ) (mV)=280, Vin (V)="2.2 to 16"
U3: library part CMP-0111-00366-1, "MachXO2 High Performance CPLD with 256 LUTs, Voltage Regulator, 2.5V/3.3V, 100-pin TQFP, Speed Grade-4, Industrial Grade, Halogen Free (RoHS)", Code_JEDEC=MS-026-BED, DatasheetVersion="ver01.0, Nov-2010", PackageDescription="100-Pin Thin Quad Flat Pack (TQFP100)", PackageReference=TQFP100, PackageVersion="ver02.6, Nov-2010"

## Free pads (board coordinates)
  round 60 hole 137.8: 5(196.85,1948.82) 7(1968.5,1948.82) 8(1968.5,196.85)

## Via types
v1: diameter 21.65, hole 11.81, Top Layer to Bottom Layer, tented both sides, 114 vias

## Nets (pads, with @x,y where several pads share a name; then routed paths per layer and width w, separated by ;. In a path a pad name is that pad's centre, name@x,y a point inside that pad or via, vN(x,y) a via of type N, cw(c..) or ccw(c..) an arc to the next point about the centre after c; other vN are vias at no path point)
3.3V: C12.1 C13.1 C14.1 C15.1 L1.2 P2.1 R1.2 R9.2 R10.2 R11.2 R12.2 U3.50 U3.100 | length 4718
  Top Layer w5: R1.2 755,1151.05 755,1185 770,1200 835,1200 935,1300 1019.21,1300 U3.100
  Top Layer w20: L1.2 609.84,859.84 617.58,859.84 617.65,859.77 688.28,859.77 700,871.49 700,1140 ; v1(840,1720) 801.98,1720 800,1721.98 800,1690 785,1675 765,1675 748.5,1658.5 R10.2 R9.2 748.5,1521.5 760,1510 C15.1 716.28,1481.28 700,1465 700,1436.11 698,1434.11 698,1200.89 700,1198.89 700,1140 ; P2.1 1595.47,1030.47 802.46,1030.47 790.75,1042.19 790.75,1110.34 753.5,1147.59 R1.2 748.95,1145 705,1145 700,1140 ; U3.50@1640.16,1777.56 1662.28,1799.68 1684.68,1799.68 v1(1685,1800) ; v1(1745,1880) 1833.24,1880 1844.95,1868.28 1844.95,1841.54 R11.2 1915,1835 1932.32,1817.68 C12.1 ; v1(1746.82,1203.18) 1788.16,1203.18 1791.4,1199.94 1791.4,1183.6 1828.78,1146.22 1828.78,1137.72 R12.2
  Bottom Layer w20: v1(840,1720) 935,1815 935,1870 985,1920 1650,1920 1690,1880 v1(1745,1880) 1745,1800 ; v1(1685,1800) 1745,1800 ; v1(1746.82,1203.18) 1745,1205 1745,1800
3.3VD: C4.2 C20.2 C28.2 J2.6 L1.1 M1.12 P4.1 P4.2 P4.3 R2.2 R6.2 R8.1 U2.5 | length 4185.4
  Top Layer w5: v1@145,1290 v1(146.5,1291.5)
  Top Layer w20: v1(146.5,1291.5) R2.2 ; v1(390,845) v1@390,845.45 ; U2.5 U2.5@395,889.33 ; C4.2@551.49,915 C4.2 ; v1(560,835) 560,777.03 607.03,730 710,730 ; 560,850 560.16,849.84 ; v1(710,400) 710,730 ; M1.12@1374.83,240.39 1377.78,237.44 1377.78,158.72 C20.2 ; M1.12 v1(1375,325) ; R8.1 1730,955 1695,920 v1(1680,920) 1679.17,920.83 1240.83,920.83 1110.66,790.66 1082.16,790.66 R6.2 1073.33,781.84 1073.33,741.72 1061.62,730 710,730 ; C28.2 1875,735.45 v1(1874.55,735) J2.6
  Bottom Layer w20: v1(146.5,1291.5) 115,1260 115,890 160,845 215,845 ; P4.1 P4.2 P4.3 215,845 ; v1(420,845) v1(390,845) 215,845 ; v1(710,400) 1335,400 1374.83,360.17 1374.83,305.17 ; v1(1680,920) 1750,920 1810,860 1810,770 1845,735 v1(1874.55,735)
CC1310_nRESET: C19.1 J2.4 M1.3 R8.2 SW1.2' | length 1176.7
  Top Layer w5: M1.3@1675,790 1675,855 1700,880 1835,880 ; R8.2 1835,910 ; C19.1 1870,1020 ; J2.4 1953.43,635 1865,635 1835,665 1835,880 ; SW1.2' 2088.54,1203.98 2054.97,1170.4 1945.4,1170.4 1870,1095 1870,1020 ; 1835,880 1835,910 ; 1835,910 1860,910 1870,920 1870,1020
CC1310_TCKC: J2.1 M1.2 | length 509.9
  Top Layer w5: M1.2@1725,790 1725,525 1760,490 1953.94,490 J2.1
CC1310_TMSC: J2.3 M1.1 | length 368.3
  Top Layer w5: M1.1@1775.15,790 1775.15,614.85 1805,585 1952.64,585 J2.3
CC1310_UART_RX: M1.5 P1.2 U1.20 | length 2787.1
  Top Layer w5: U1.20 270.9,1257.94 232.94,1257.94 220,1245 220,1165 230,1155 230,830 445,615 v1(445,495) 445,125 405,85 P1.2 ; v1(1575,505) 1575.17,505.17 M1.5
  Bottom Layer w5: v1(445,495) 449.51,495 459.51,505 v1(1575,505)
CC1310_UART_TX: M1.6 P1.3 U1.21 | length 2660.3
  Top Layer w5: U1.21 239.84,1239.84 235,1235 235,1177.15 245,1167.15 245,840 465,620 v1(465,540) 465,125 505,85 P1.3 ; v1(1524.43,545) 1524.43,790 1515,799.43 1525,809.43 1520,814.43 M1.6
  Bottom Layer w5: v1(465,540) 467.5,542.5 1522.5,542.5 v1@1525,545
CoP_LED1: LED3.1 M1.4 P1.1 | length 2111.8
  Top Layer w5: P1.1 v1(305,665) ; LED3.1 1076.5,883.5 v1(1075,885) 1100,910 v1(1145,910) ; v1(1255,890) 1601.09,890 1625.17,865.91 M1.4
  Bottom Layer w5: v1(305,665) 525,885 v1(1075,885) ; v1(1145,910) 1215,910 1235,890 v1(1255,890)
CP2102_3.3VDD: C2.2 C7.2 C8.2 R4.2 R5.2 R7.1 U1.5 U1.6 U2.1 U2.3 | length 796.7
  Top Layer w10: C2.2@548.28,1195 548.28,1218.28 560,1230 603.28,1230 615,1241.72 615,1268.5 R7.1 R7.1@616.5,1268.03
  Top Layer w20: R5.2 151.25,1155.25 v1(151.25,1124.2) ; R4.2 153.58,967.08 183.28,967.08 195,978.8 v1(195,1060) ; U2.3 315,1010.67 315.83,1011.5 315,1012.32 v1(315,1060) 399.53,1060 408.27,1068.74 409.53,1068.74 ; 410,1050 410.72,1049.28 C7.2
  Bottom Layer w20: v1(151.25,1124.2) 151.25,1103.75 v1(195,1060) v1(315,1060)
CP2102_RXT: LED1.1 U1.13 | length 658.3
  Top Layer w5: LED1.1 88.5,1073.5 100,1085 155,1085 205,1135 v1(205,1370) ; U1.13 414.61,1322.91 414.61,1369.61 v1(415,1370)
  Bottom Layer w5: v1(205,1370) v1(415,1370)
CP2102_SUSPEND: LED5.1 U1.15 | length 397.9
  Top Layer w5: LED5.1 145,1405.25 145,1435 v1(165,1455) ; v1(370,1455) 374.84,1450.16 U1.15
  Bottom Layer w5: v1(165,1455) v1(370,1455)
CP2102_TXT: LED2.1 U1.14 | length 485.8
  Top Layer w5: LED2.1 148.31,1226.82 176.82,1226.82 186.67,1236.67 186.67,1396.67 v1(190,1400) ; U1.14 v1(394.48,1390)
  Bottom Layer w5: v1(190,1400) 384.48,1400 v1(394.48,1390)
D+: D1.2 J1.3 U1.3 | length 723.2
  Top Layer w5: J1.3 212.24,1650 326.04,1650 370,1606.04 370,1555 356.75,1541.75 356.75,1532.82 341.54,1517.6 D1.2 330.31,1516.22 330.31,1490.31 290,1450 290,1302.81 309.99,1282.82 309.99,1183.85 318.83,1175.01 339.06,1175.01 352.74,1161.34 352.74,1160.57 355.16,1158.15 U1.3
D-: D1.3 J1.2 U1.4 | length 753.4
  Top Layer w5: J1.2 313.96,1676.22 380,1610.18 380,1555 395.11,1539.89 395.11,1532.82 410.33,1517.6 D1.3 418.31,1491.69 460,1450 460,1322.81 417.78,1280.59 417.78,1181.62 410.06,1173.9 389.83,1173.9 377.26,1161.34 377.26,1160.57 374.84,1158.15 U1.4
DIO_4: M1.8 P1.5 | length 1270.3
  Top Layer w5: P1.5 705,305 1275,875 1395,875 1425.17,844.83 1425.17,836.31 M1.8 ; M1.8@1425,790 1425,819.61 M1.8@1425,836.31
DIO_5: M1.9 P1.6 | length 1150.5
  Top Layer w5: P1.6 805,380 1287.54,862.54 1357.46,862.54 1375.17,844.83 1375.17,832.93 M1.9 ; M1.9@1375,790 1375,819.61 M1.9@1375,832.93
DIO_6: M1.10 P1.7 | length 1002.4
  Top Layer w5: P1.7 905,450 1292.07,837.07 1325,837.07 M1.10@1325,790
DIO_7: M1.13 P1.8 | length 711.1
  Top Layer w5: P1.8 1005,220 1137.93,352.93 1388.37,352.93 1424.83,316.48 M1.13@1424.83,240.39
DIO_8: M1.14 P1.9 | length 488.5
  Top Layer w5: P1.9 1145,115 1435,115 1474.83,154.83 M1.14@1474.83,240.39
DIO_9: M1.15 P1.10 | length 442.6
  Top Layer w5: P1.10 1210,70 1440,70 1524.83,154.83 M1.15@1524.83,240.39
FPGA_INITn: LED4.1 P2.14 U3.77 | length 1280.5
  Top Layer w5: LED4.1 758.5,991.5 780,970 v1(860,970) 861.81,968.19 1033.19,968.19 P2.14 ; v1(910,1750) 914.39,1754.39 1019.63,1754.39 U3.77
  Bottom Layer w5: v1(860,970) 860,1670 910,1720 v1(910,1750)
GND: C1.2 C2.1 C3.1 C4.1 C5.1 C6.1 C7.1 C8.1 C9.2 C10.2 C11.2 C12.2 C13.2 C14.2 C15.2 C16.2 C17.2 C18.2 C19.2 C20.1 C21.2 C22.2 C23.2 C24.2 C25.2 C26.2 C27.2 C28.1 D1.1 J1.5 J1.6 J1.7 J1.8 J1.9 J1.10 J1.11 J2.2 M1.11 M1.18 M1.20 P5.1 P5.2 P5.3 RF1.2 RF1.3 RF1.4 SW1.1' U1.2 U1.25 U2.2 U3.6 U3.22 U3.33 U3.44 U3.56 U3.72 U3.79 U3.92 | length 1942.1
  Top Layer w10: U3.92 v1(1084.41,1458.5) ; U3.79 v1(1084.41,1714.41) ; v1(1140.31,1770.31) U3.72 ; U3.6 v1(1179.68,1304.17) ; v1(1455.28,1770.31) U3.56 ; U3.22 v1(1494.65,1304.17) ; U3.33 1615.91,1440 v1(1670,1440) ; U3.44 1615.08,1655 v1(1670,1655)
  Top Layer w15: v1(335,1100) U1.2@335,1137.01
  Top Layer w20: J1.5 v1(261.24,1599.45) 310.87,1599.45 325.31,1585 D1.1@331.22,1585 ; U2.2@355,1018.07 v1(355,1031.54) ; C1.2 v1(485,1868.27) ; C1.2@496.18,1815 v1(548.27,1815) ; C20.1@1324.17,155.66 1323.5,155 1321.87,156.63 1321.87,237.44 M1.11@1324.83,240.39 ; M1.11 v1(1325,325) ; v1(1735,1020) C19.2 ; v1@1865,1755 v1(1870.71,1760.71) 1915.71,1760.71 1935,1780 C12.2 ; C28.1 v1(1875,890) ; v1(1876.85,538.15) J2.2 ; v1(1979.37,1210.87) SW1.1' v1(2031.46,1262.96)
  Top Layer w30: 105,1765 105,1755 105.31,1754.69 105.31,1741.18 ; J1.7 113.19,1552.2 105.31,1560.08 J1.10 J1.9 105.31,1741.18 ; J1.6 113.19,1749.06 105.31,1741.18 ; C15.2 v1(833.72,1481.28) ; v1@1655,168.75 1655,170 1675,190 M1.18@1675,250.57 ; M1.20@1775,246.19 1775,185 v1@1790,170
  other v1: 1655,75 1790,75 1655,105 1790,105 1655,135 1790,135 1655,165 1790,165 645,915 645,980 645,1050 645,1115 645,1190 1870,1205 735,1235 1870,1285 735,1320 650,1340 1870,1360 735,1400 650,1405 1870,1440 1870,1520 1870,1600 1870,1680 725,1720 725,1800 725,1885 725,1965
NetC3_2: C3.2 U2.4 | length 297.8
  Top Layer w20: U2.4 317.6,932.6 335,950 519.07,950 540.52,971.45 545.79,971.45 553.5,979.16 C3.2
NetLED1_2: LED1.2 R4.1 | length 134.5
  Top Layer w5: R4.1 90.12,966.61 90.12,1000.12 101.73,1011.73 141.73,1011.73 151.22,1021.22 151.22,1049.72 LED1.2
NetLED2_2: LED2.2 R5.1 | length 66.1
  Top Layer w5: LED2.2@81.76,1225.43 81.76,1161.75 R5.1
NetLED3_2: LED3.2 R6.1 | length 65
  Top Layer w5: R6.1 LED3.2
NetLED4_2: LED4.2 R1.1 | length 86.6
  Top Layer w6: LED4.2@819,1067.5 R1.1@819,1147.06
  Top Layer w20: R1.1 R1.1@819,1147.06 ; LED4.2@819,1067.5 LED4.2
NetLED5_2: LED5.2 R2.1 | length 65.7
  Top Layer w5: LED5.2 81.76,1341.75 R2.1
NetM1_19: M1.19 RF1.1 | length 78.5
  Top Layer w5: M1.19@1724.83,240.39 1724.83,162.17 RF1.1@1725,162
NetP2_2: P2.2 U3.95 | length 859.1
  Top Layer w5: U3.95 1060.55,1399.45 1070,1390 1070,1302.3 1010,1242.3 1010,1185 1023.33,1171.67 1443.33,1171.67 P2.2
NetP2_3: P2.3 U3.94 | length 802.9
  Top Layer w5: v1(965.87,1419.13) U3.94 ; v1(995,1165) 999.51,1165 1004.51,1160 1355,1160 P2.3
  Bottom Layer w5: v1(965.87,1419.13) 965.87,1194.13 v1(995,1165)
NetP2_4: P2.4 U3.91 | length 809.4
  Top Layer w5: v1(955,1480) 1018.43,1480 U3.91 ; v1(968.12,1152.83) 974.28,1146.67 1268.33,1146.67 P2.4
  Bottom Layer w5: v1(955,1480) 955,1475.49 947.54,1468.03 947.54,1172.46 967.17,1152.83 v1(968.12,1152.83)
NetP2_5: P2.5 U3.90 | length 778.7
  Top Layer w5: v1(935,1500) 1017.17,1500 1017.64,1500.47 U3.90 ; v1(940,1134.51) 1180.49,1134.51 P2.5
  Bottom Layer w5: v1(935,1500) 935,1139.51 v1(940,1134.51)
NetP2_6: P2.6 U3.82 | length 877
  Top Layer w5: v1(902.5,1595) 905,1595 965,1655 1019.88,1655 U3.82 ; v1(910,1110) 912.03,1112.03 1102.97,1112.03 P2.6
  Bottom Layer w5: v1(902.5,1595) 902.5,1117.5 v1(910,1110)
NetP2_7: P2.7 U3.81 | length 852.9
  Top Layer w5: v1(890,1080) 1035,1080 P2.7 ; v1(890,1625) 933.76,1668.76 1013.96,1668.76 U3.81
  Bottom Layer w5: v1(890,1080) 884.17,1085.83 884.17,1619.17 v1(890,1625)
NetP2_8: P2.8 U3.32 | length 580.8
  Top Layer w5: U3.32 1615.12,1418.74 1686.27,1418.74 v1(1686.67,1418.34)
  Bottom Layer w5: P2.8 1635,975 1600,1010 1600,1120 1695,1215 1695,1407.08 1694.85,1407.23 1694.85,1415.15 1691.66,1418.34 v1(1686.67,1418.34)
NetP2_9: P2.9 U3.31 | length 544.4
  Top Layer w5: U3.31 1615.14,1399.03 1668.33,1399.03 v1(1668.74,1398.62)
  Bottom Layer w5: P2.9 1545,975 1585,1015 1585,1135 1680,1230 1680,1388.74 1670.13,1398.62 v1(1668.74,1398.62)
NetP2_10: P2.10 U3.27 | length 485.4
  Top Layer w5: U3.27 1615.08,1320.35 1661.32,1320.35 v1(1661.67,1320)
  Bottom Layer w5: P2.10 1490,1025 1490,1077.36 1530.3,1117.67 1532.67,1117.67 1661.67,1246.67 v1(1661.67,1320)
NetP2_11: P2.11 U3.49 | length 1233.1
  Top Layer w5: P2.11 1345,975 1382.97,1012.97 1692.97,1012.97 v1(1730,1050) ; U3.49 1615.94,1755 1715,1755 1715,1751.1 v1(1718.47,1747.64)
  Bottom Layer w5: v1(1718.47,1747.64) 1718.47,1743.13 1725,1736.6 1725,1059.51 1730,1054.51 v1(1730,1050)
NetP2_12: P2.12 U3.48 | length 1333.1
  Top Layer w5: U3.48 1615.63,1735 v1(1695,1735)
  Bottom Layer w5: P2.12 1277.03,937.97 1655.34,937.97 1705,987.64 1705,1723.74 1695,1733.74 v1(1695,1735)
NetP2_13: P2.13 U3.76 | length 1170.3
  Top Layer w5: v1(878.33,1004.65) 878.33,1009.41 880.94,1012.03 1102.97,1012.03 P2.13 ; v1(935,1775) 936.54,1773.46 U3.76
  Bottom Layer w5: v1(878.33,1004.65) 874.6,1004.65 871.67,1007.57 871.67,1661.67 935,1725 v1(935,1775)
NetP3_1: P3.1 U3.75 | length 452.2
  Top Layer w5: v1(895,1945) 898.33,1941.67 1015.49,1941.67 1081.26,1875.9 U3.75
  Bottom Layer w5: P3.1 787.03,2057.97 787.03,2052.97 v1(895,1945)
NetP3_2: P3.2 U3.74 | length 383.5
  Top Layer w5: v1(960,1960) 1016.67,1960 1100.94,1875.73 U3.74
  Bottom Layer w5: P3.2 868.68,2076.32 868.68,2051.32 v1(960,1960)
NetP3_3: P3.3 U3.71 | length 396.3
  Top Layer w5: U3.71 v1(1160,1947.5)
  Bottom Layer w5: P3.3 960,2040 985,2015 1092.5,2015 v1(1160,1947.5)
NetP3_4: P3.4 U3.70 | length 313.3
  Top Layer w5: U3.70 1185,1839.8 v1(1185,1975)
  Bottom Layer w5: P3.4 1065,2085 1172.04,1977.96 1182.04,1977.96 v1(1185,1975)
NetP3_5: P3.5 U3.67 | length 283.1
  Top Layer w5: v1(1235,1975) 1235,1838.23 U3.67
  Bottom Layer w5: P3.5 1168.68,2076.32 1168.68,2051.32 1232.04,1987.96 1232.04,1977.96 v1(1235,1975)
NetP3_6: P3.6 U3.66 | length 251.2
  Top Layer w5: U3.66 1260,1836.06 v1(1260,1960)
  Bottom Layer w5: v1(1260,1960) P3.6
NetP3_7: P3.7 U3.58 | length 277.8
  Top Layer w5: v1(1355,1970) 1415,1910 1415,1835.39 U3.58
  Bottom Layer w5: v1(1355,1970) 1355,2080 P3.7
NetP3_8: P3.8 U3.57 | length 261.1
  Top Layer w5: v1(1435,1960) 1435,1835.08 U3.57
  Bottom Layer w5: v1(1435,1960) 1460,1985 P3.8
NetP3_9: P3.9 U3.54 | length 277.6
  Top Layer w5: U3.54 1494.65,1929.65 1560,1995 P3.9
NetP3_10: P3.10 U3.53 | length 346
  Top Layer w5: U3.53 1514.33,1914.33 1585,1985 1645,1985 1660,2000 P3.10
NetP3_11: P3.11 U3.52 | length 402.7
  Top Layer w5: U3.52 1534.02,1904.02 1595,1965 1695,1965 1760,2030 P3.11
NetP3_12: P3.12 R13.2 | length 159.8
  Top Layer w5: R13.2 1850,1931.5 1850,2010 1860,2020 P3.12
NetR7_2: R7.2 U1.9 | length 200.1
  Top Layer w5: U1.9 459.26,1221.9 486.9,1221.9 490.61,1225.61 490.61,1304.39 v1(487.81,1307.19) ; R7.2 553.5,1266.5 R7.2@555,1265
  Bottom Layer w5: v1(487.81,1307.19) 532.81,1307.19 v1(555,1285)
NetR13_1: R13.1 R14.1 U3.51 | length 2171.8
  Top Layer w5: R14.1 v1(1230,735) ; U3.51 1553.7,1888.7 v1(1555,1890) 1560,1890 1600,1930 R13.1@1775,1930
  Bottom Layer w5: v1(1230,735) 1230,760.92 1075.92,915 955,915 930,940 930,1118.59 915,1133.59 915,1581.58 1223.42,1890 v1(1555,1890)
VBUS: C1.1 C5.2 C6.2 FB1.1 U1.7 U1.8 | length 259.1
  Top Layer w20: FB1.1 471.18,1700 C1.1 ; 495,1200 517.5,1222.5 517.5,1300.74 553.5,1336.74 C5.2 ; C6.2 C6.2@553.5,1408.82
  other v1: 490,1190
VBUS_IN: D1.4 FB1.2 J1.1 | length 276.4
  Top Layer w20: J1.1 212.52,1700.91 342.52,1700.91 346.22,1697.2 346.22,1678.78 401.6,1623.4 401.6,1600.12 409.32,1592.4 D1.4
VCCIO0: C9.1 C10.1 C11.1 R9.1 U3.80 U3.93 | length 844
  Top Layer w10: C10.1 798.84,1318.88 C9.1 797.68,1399.5 C11.1 850.66,1400.66 860,1410 860,1440 ; R9.1 852.34,1552.66 860,1545 ; U3.93 1019.06,1440 860,1440 ; U3.80 1019.96,1695 930,1695 860,1625 860,1545 ; 860,1440 860,1545
VCCIO1: C16.1 C17.1 C18.1 R10.1 U3.55 U3.73 | length 1421.6
  Top Layer w10: R10.1 812,1633.78 843.78,1633.78 875,1665 875,1785 856.24,1803.76 C16.1 C18.1 C17.1 818.51,1980.83 1013.52,1980.83 1029.35,1965 1069.72,1965 ; U3.73@1120.63,1834.8 1120.63,1914.09 1069.72,1965 ; U3.55 1474.96,1949.49 1428.63,1995.83 1176.37,1995.83 1145.55,1965 1069.72,1965
VCCIO2: C25.1 C26.1 C27.1 R11.1 U3.26 U3.46 | length 1128.6
  Top Layer w10: U3.26 1584.71,1301.02 1583.49,1299.8 1560.2,1299.8 1535,1325 1535,1655 ; U3.46 1574.72,1694.72 1535,1655 ; C27.1 C26.1 C25.1 1789.17,1820.31 1782.95,1826.53 1782.95,1827.84 1775.79,1835 1617.17,1835 1535,1752.83 1535,1655
VCCIO3: C21.1 C22.1 C23.1 C24.1 R12.1 U3.5 U3.11 U3.23 | length 1322.2
  Top Layer w5: U3.5 U3.5@1160,1269.53 ; U3.11 U3.11@1278.11,1269.53 ; U3.23@1514.33,1210.47 U3.23 U3.23@1514.33,1271.37
  Top Layer w10: U3.5@1160,1239.68 1160,1195 1169.33,1185.67 1289.33,1185.67 ; U3.11 1278.46,1239.65 1278.46,1196.54 1289.33,1185.67 ; U3.23@1514.33,1210.47 1514.33,1185.67 ; R12.1 1768.5,1125 1701.34,1125 1640.67,1185.67 ; C24.1@1786.74,1363.05 C23.1@1786.74,1441.54 ; C21.1@1787.01,1283.67 C24.1@1787.01,1361.62 ; C23.1 C22.1 ; C21.1 1735,1282.82 1640.67,1188.49 1640.67,1185.67 ; 1289.33,1185.67 1514.33,1185.67 ; 1514.33,1185.67 1640.67,1185.67
  Top Layer w20: C24.1@1786.74,1363.05 C24.1 C24.1@1787.01,1361.62 ; C23.1@1786.74,1441.54 C23.1 ; C21.1@1787.01,1283.67 C21.1
Visual_label_PWM: M1.7 P1.4 R14.2 | length 1540.2
  Top Layer w5: P1.4 v1(605,465) ; v1(1230,465) R14.2 1398.5,608.5 1475,685 M1.7@1475,790
  Bottom Layer w5: v1(605,465) v1(1230,465)
pads on no net: J1.4 J2.5 J2.MP1 J2.MP2 M1.16 M1.17 SW1. SW1.1 SW1.2 U1.1 U1.10 U1.11 U1.12 U1.16 U1.17 U1.18 U1.19 U1.22 U1.23 U1.24 U3.1 U3.2 U3.3 U3.4 U3.7 U3.8 U3.9 U3.10 U3.12 U3.13 U3.14 U3.15 U3.16 U3.17 U3.18 U3.19 U3.20 U3.21 U3.24 U3.25 U3.28 U3.29 U3.30 U3.34 U3.35 U3.36 U3.37 U3.38 U3.39 U3.40 U3.41 U3.42 U3.43 U3.45 U3.47 U3.59 U3.60 U3.61 U3.62 U3.63 U3.64 U3.65 U3.68 U3.69 U3.78 U3.83 U3.84 U3.85 U3.86 U3.87 U3.88 U3.89 U3.96 U3.97 U3.98 U3.99

## Polygon pours and split planes (outlines as drawn)
GND on Bottom Layer "Top Layer-No Net" (solid, remove dead copper, pour order 0): 179.49,-0.38 cw(c251.82,249.08) -0.38,186.99 0,187.08 0,1968.5 cw(c268.9,1896.45) 196.85,2165.35 1968.5,2165.35 cw(c1896.45,1896.45) 2165.35,1968.5 2165.35,196.85 cw(c1896.45,268.9) 1968.5,0

## Keep-outs
Bottom Layer:
  region: 20,2080
Keep-Out Layer:
  lines w20: -0.38,186.99 ccw(c251.82,249.08) 179.49,-0.38 ; 0,187.08 0,1968.5 cw(c268.9,1896.45) 196.85,2165.35 1968.5,2165.35 cw(c1896.45,1896.45) 2165.35,1968.5 2165.35,196.85 cw(c1896.45,268.9) 1968.5,0 179.6,0

## Other copper
Top Layer:
  rectangle net GND: 1820,1190 1890,1775
  rectangle net GND: 710,1695 770,1990
  rectangle net GND: 720,1210 770,1425
  rectangle net GND: 610,900 660,1205
  rectangle net GND: 610,1315 665,1430
  rectangle net VBUS: 470,1330 565,1715
  rectangle net VBUS: 437.52,1175 505,1210
  rectangle net CP2102_3.3VDD: 535,1040 565,1195
  rectangle net 3.3VD: 370,815 575,900
  rectangle net CP2102_3.3VDD: 394.53,1000 424.53,1137.48
  rectangle net GND: 1770,35 1805,175
  rectangle net GND: 1640,35 1795,60
  rectangle net GND: 1640,35 1675,175

## Text inside footprints (layer, text, board x,y; h text height)
P2: Top Overlay "14" at 930,950 h40; Top Overlay "7" at 935,1045 h40; Top Overlay "1" at 1715,1050 h40; Top Overlay "8" at 1705,955 h40